# EAGLE board power electronicsV4.2 (EAGLE 9.6.2)
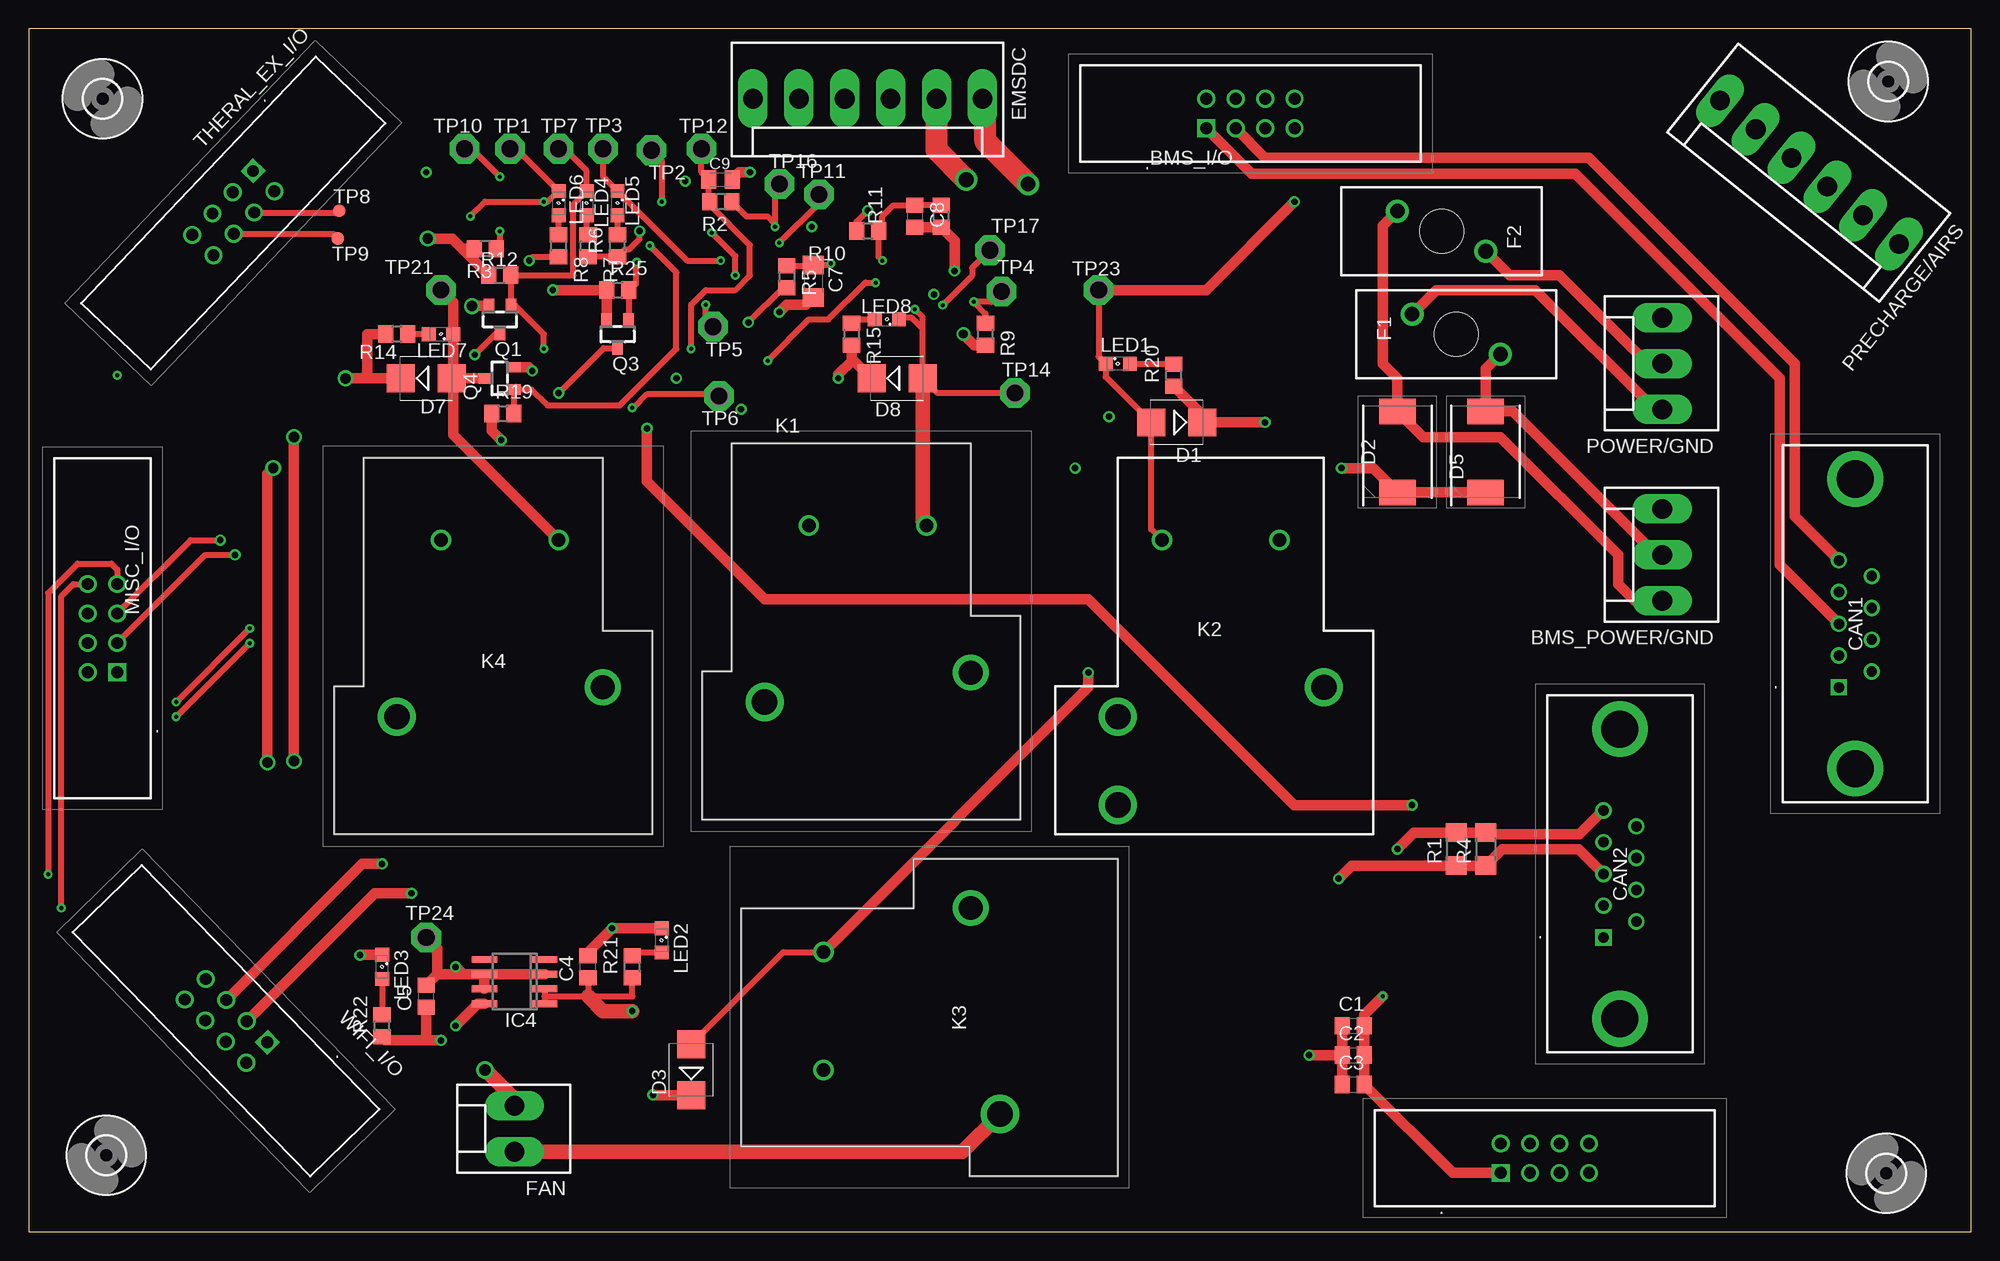
[diagram p0: board, top side]
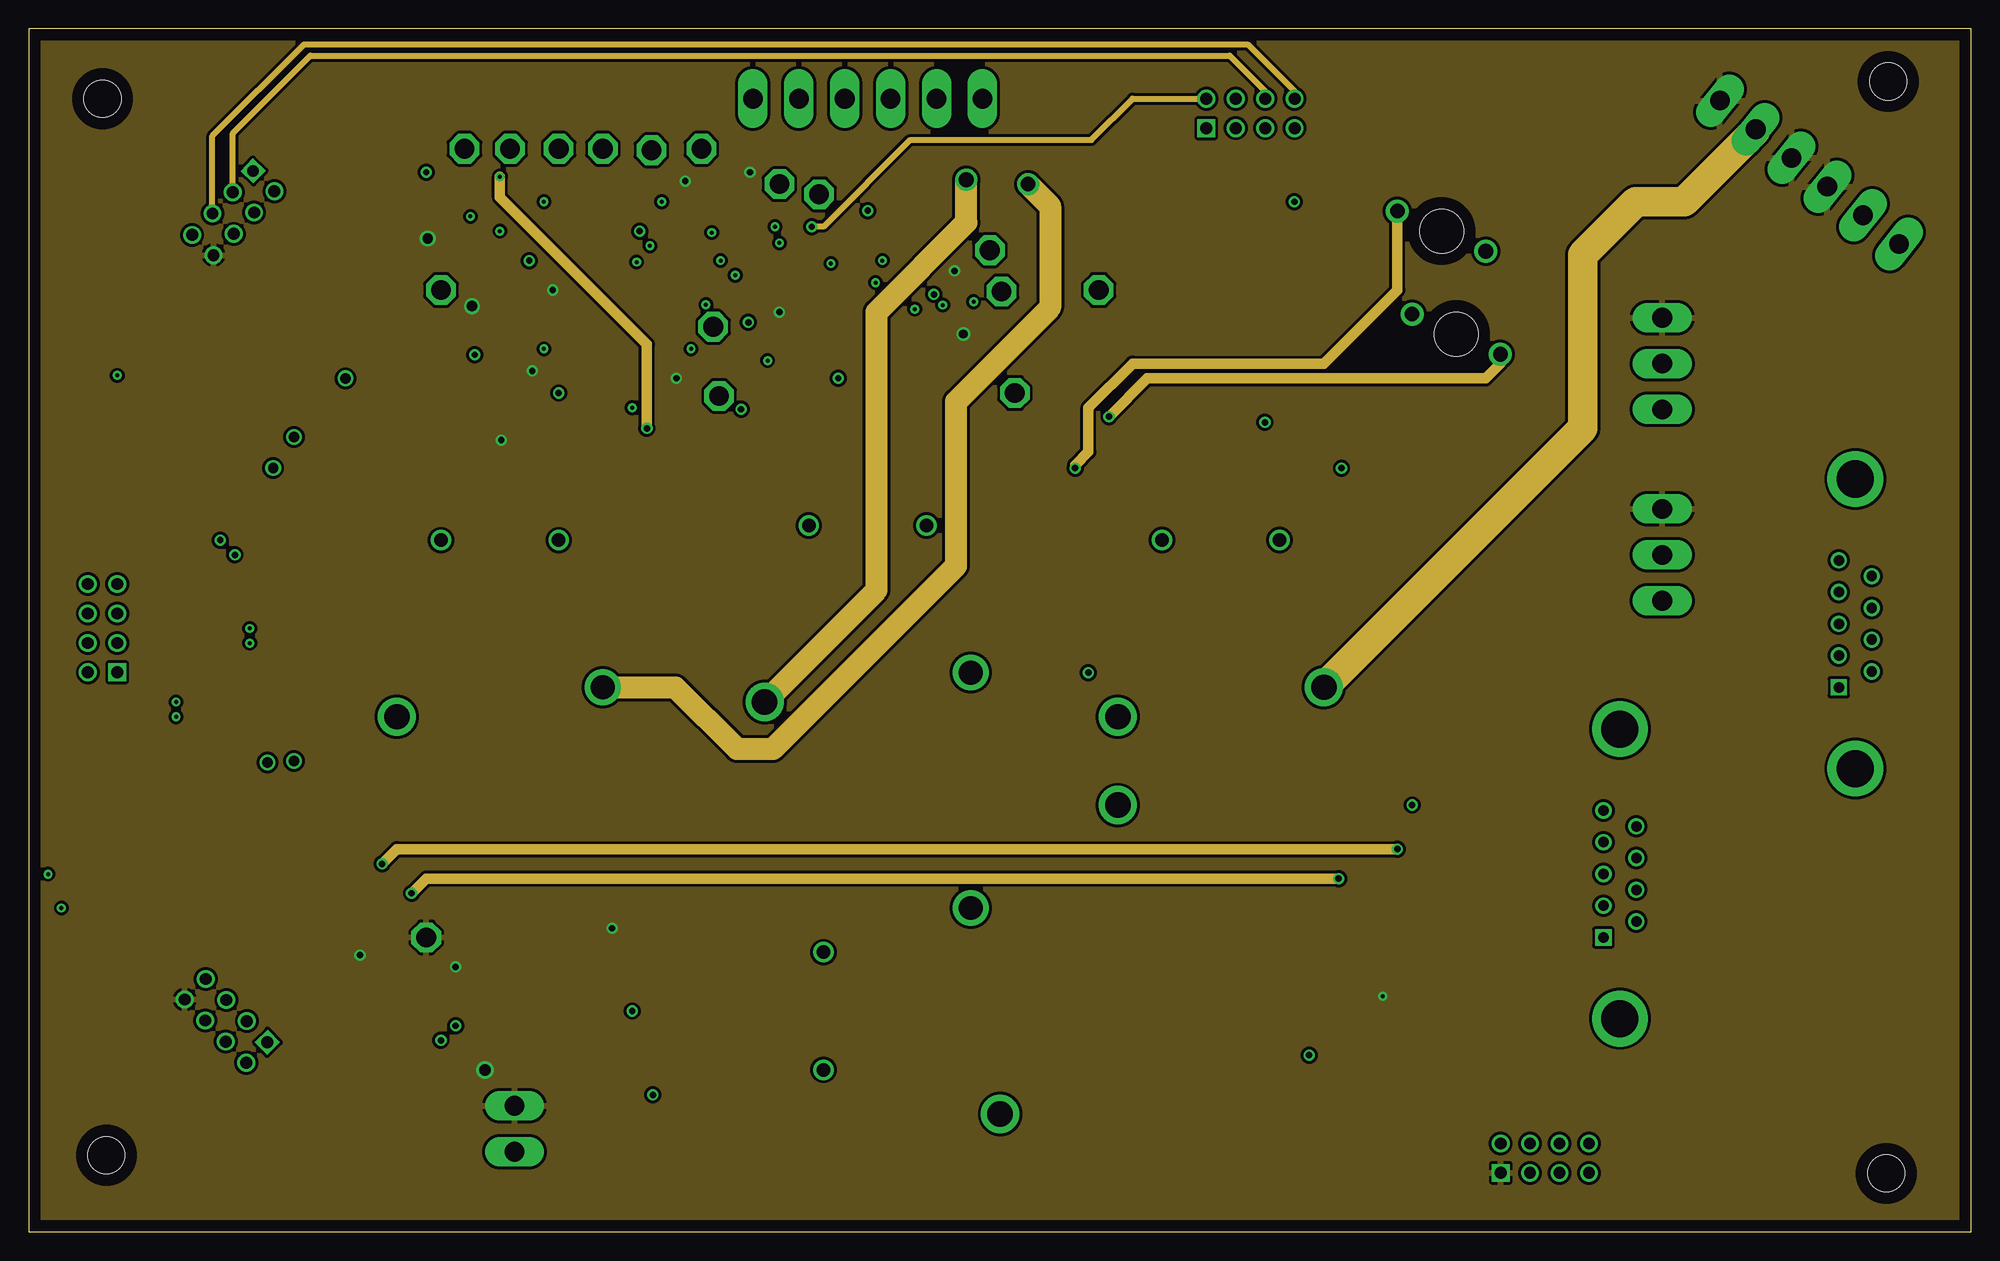
[diagram p1: board, inner layer Route2]
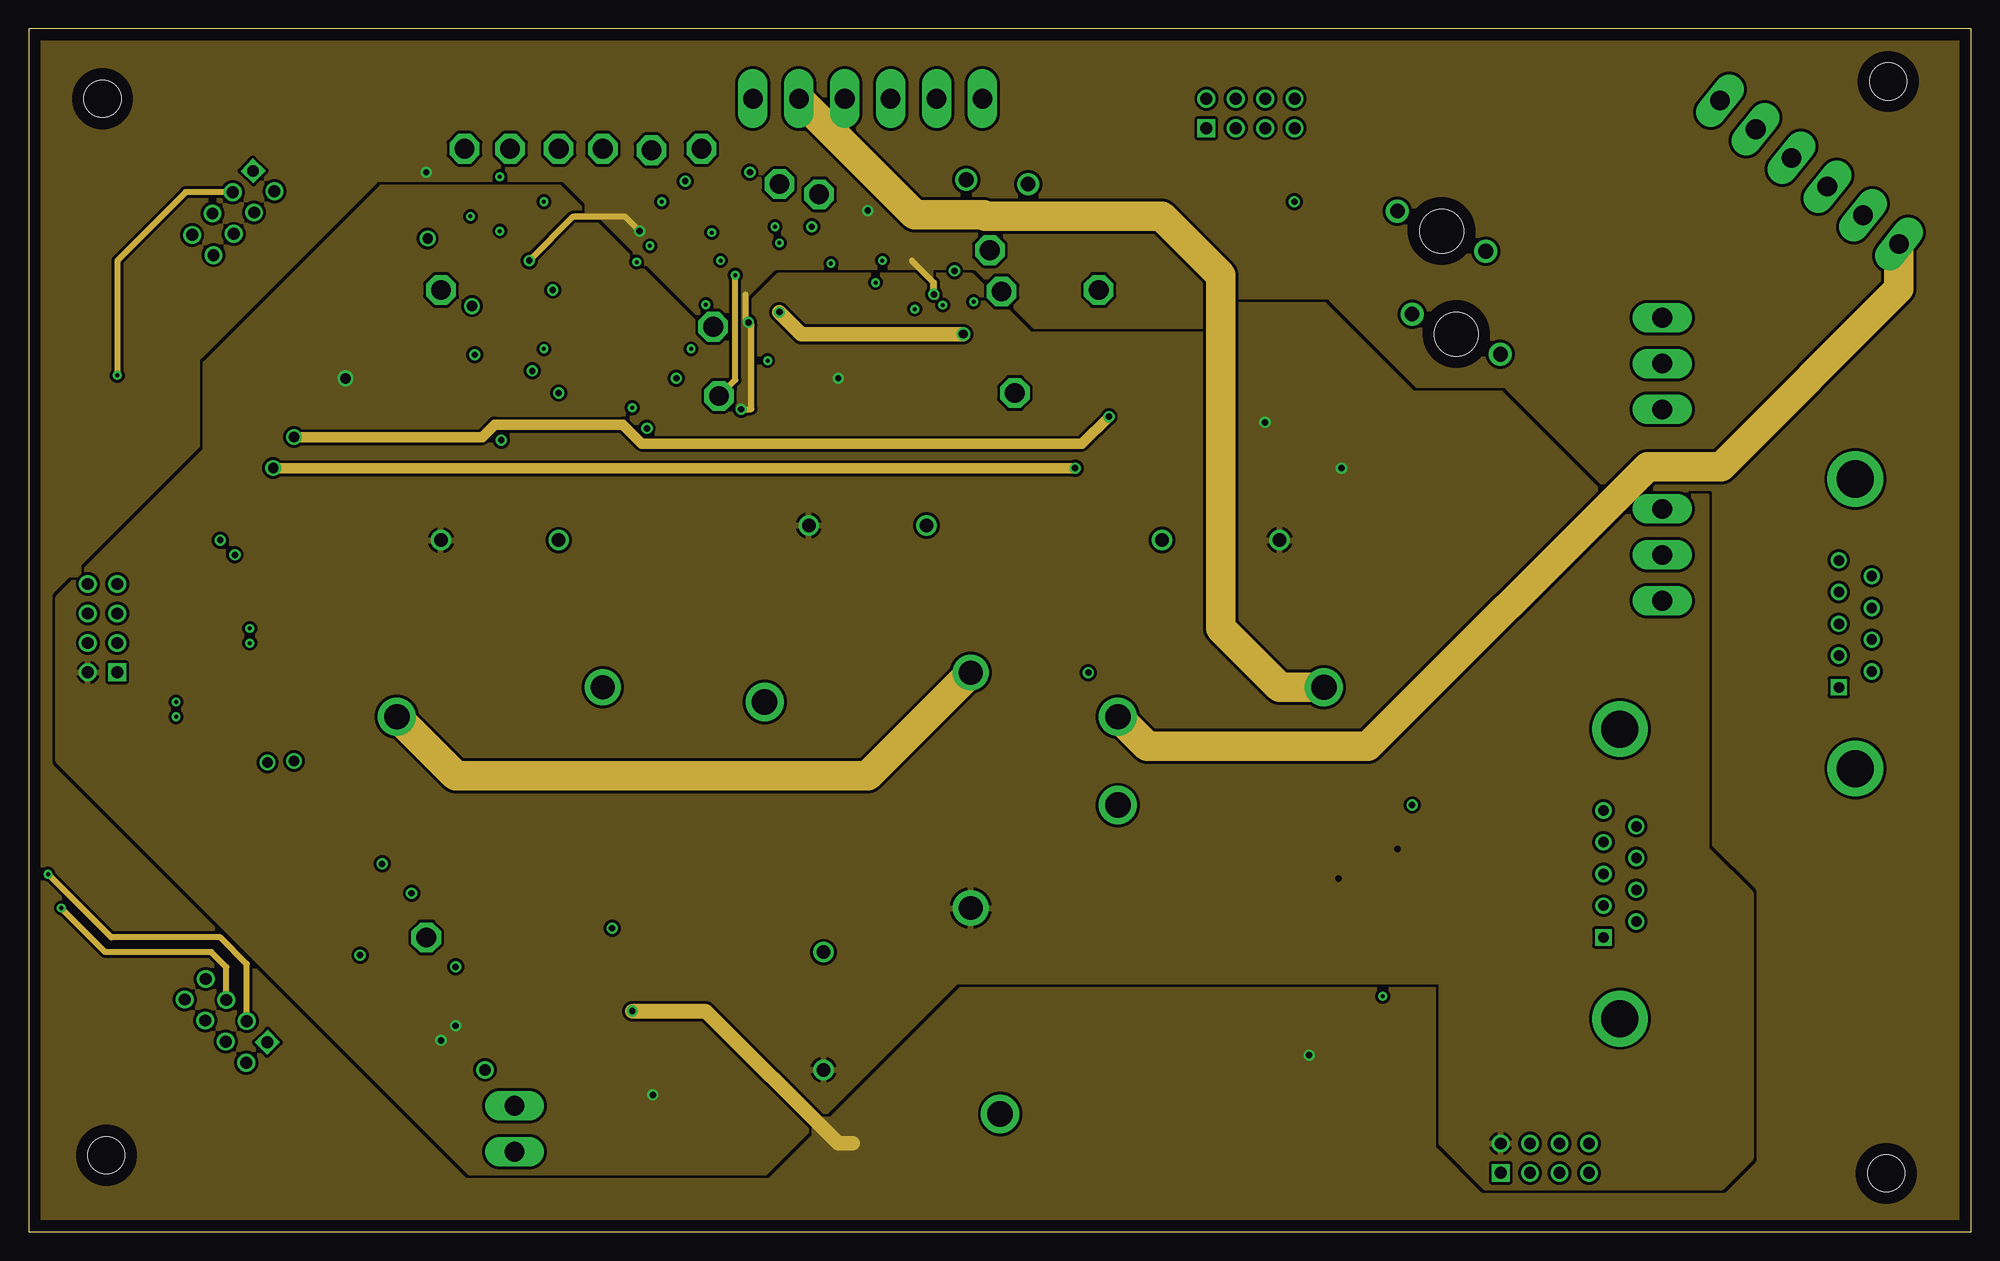
[diagram p2: board, inner layer Route15]
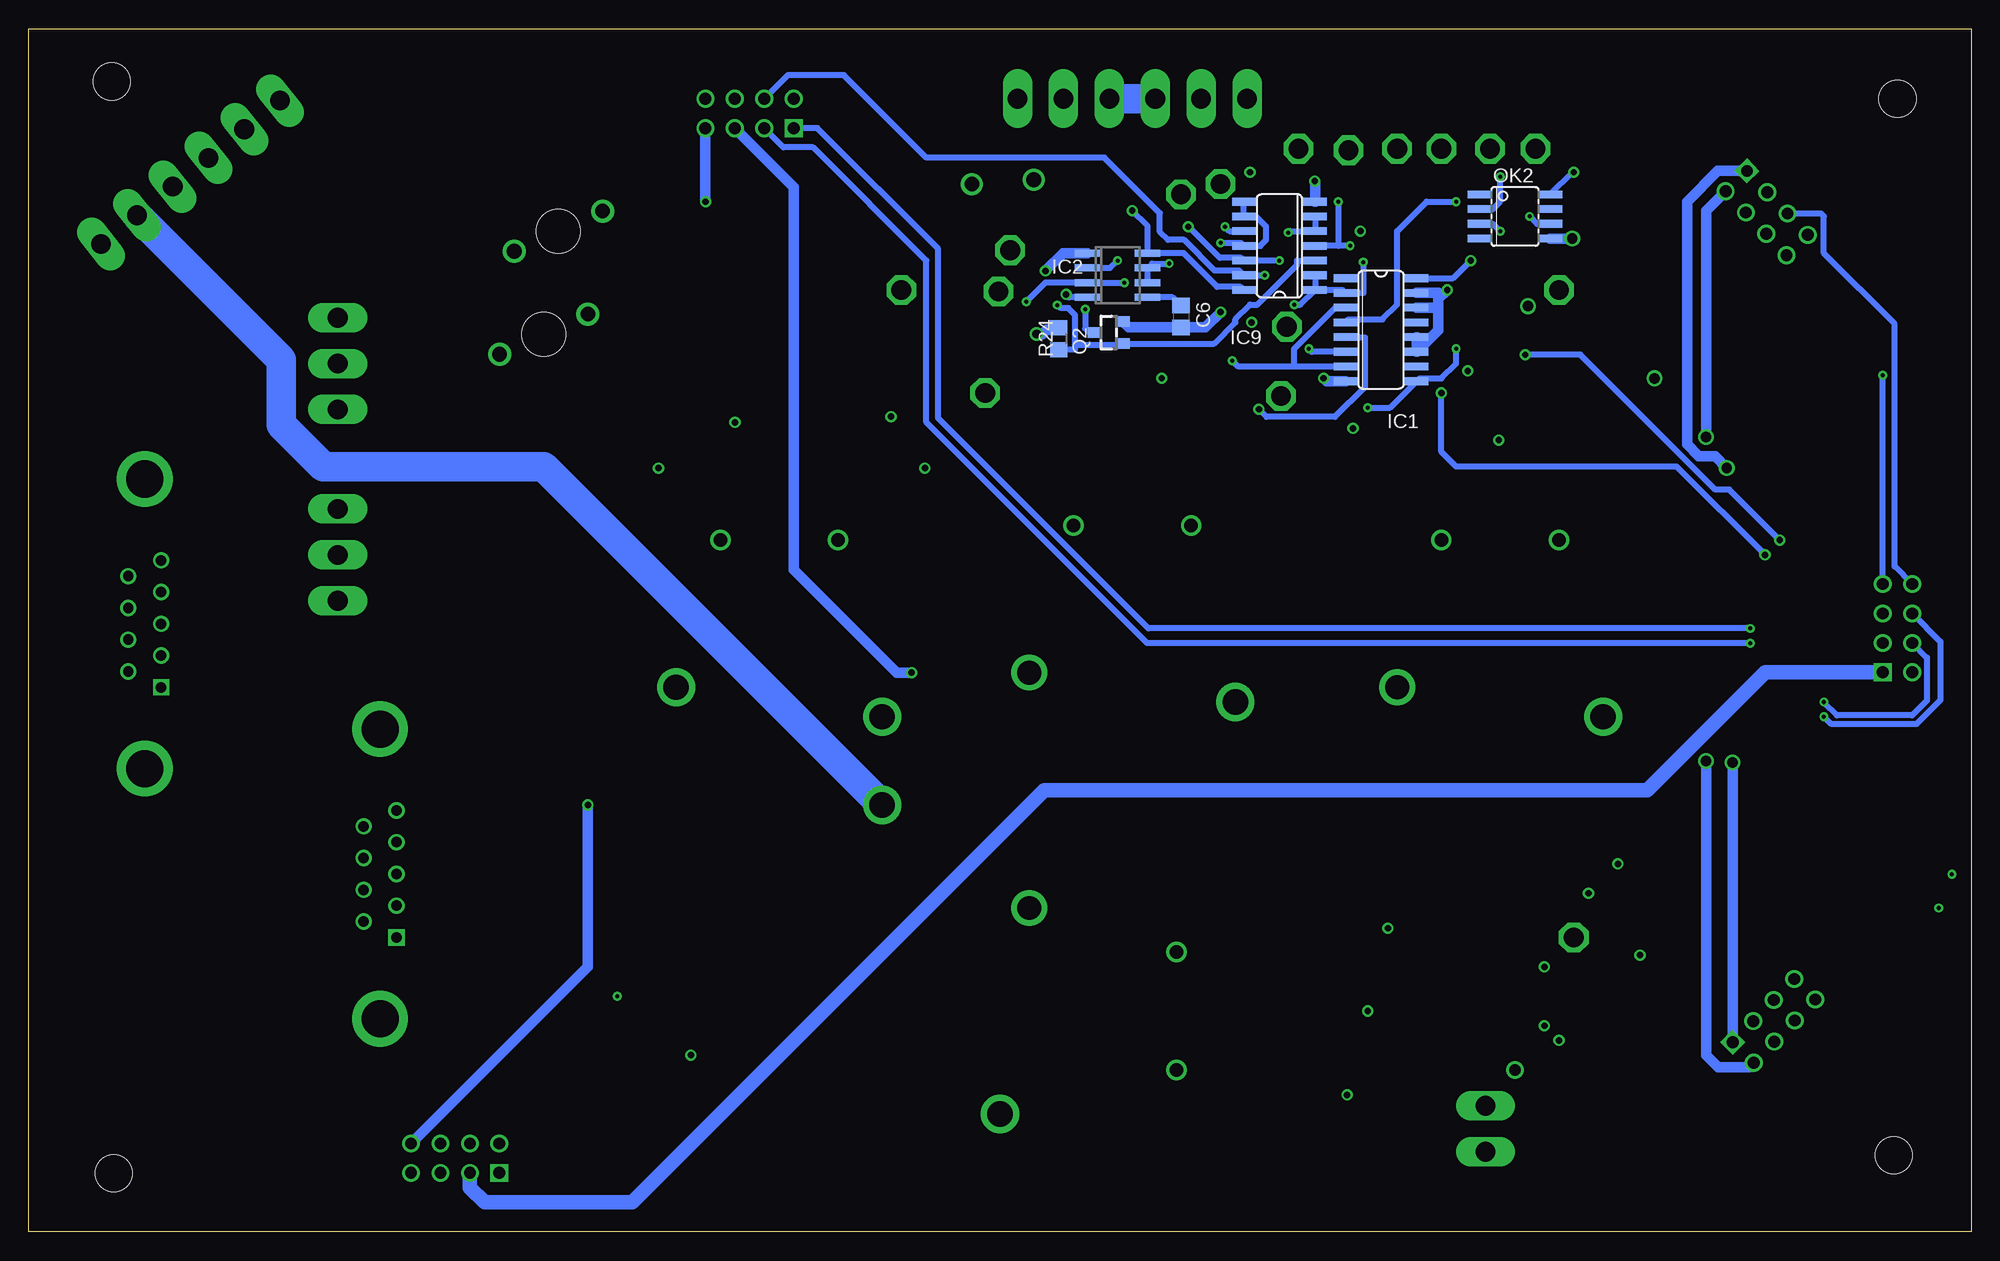
[diagram p3: board, bottom side, seen from below]

Size 167.62 x 103.81 mm. Coordinates in mm from the lower left corner, seen from the top.
Outline: 0,0 167.62,0 167.62,103.81 0,103.81 0,0
Copper layers ([2:[15:1+2*(15*16)]]): Top 0.035mm / dielectric 0.11mm / Route2 0.035mm / dielectric 1.2mm / Route15 0.035mm / dielectric 0.11mm / Bottom 0.035mm
Design rules "default *": minimum track width 6mil, minimum drill 0.35mm, track to track 10mil, track to pad 10mil, pad to pad 10mil, via to via 10mil, smd to smd 6mil, copper to edge 40mil, drill to drill 11mil, minimum pad ring 10mil, minimum via ring 8mil, stop-mask expansion 4mil, vias tented up to drill 0mil, thermal gap 10mil
Net classes: 0 default: width 0.508 mm; 1 GND: width 0.889 mm; 2 EMSDC: width 2.54 mm; 3 power: width 0.889 mm

## Footprints (pad centres in the part's own frame; a part is rotated, then mirrored left to right if it is on the bottom)
T816108A1S102CEU = drill 1.02 pad 1.53 square: 1 5.1,0 | drill 1.02 pad 1.53: 2 5.1,2.54; 3 7.64,0; 4 7.64,2.54; 5 10.18,0; 6 10.18,2.54; 7 12.72,0; 8 12.72,2.54
KK-156-3 = drill 1.7 pad 2.184 long: 1 -3.96,0; 2 0,0; 3 3.96,0
C0805 = smd 1.3 x 1.5: 1 -0.95,0; 2 0.95,0
C1206 = smd 1.6 x 1.8: 1 -1.4,0; 2 1.4,0
C0805K = smd 1.3 x 1.6: 1 -1,0; 2 1,0
LD09P24A4GV00LF = drill 0.9 pad 1.4 square: 1 0,0 | drill 0.9 pad 1.4: 2 2.74,0; 3 5.48,0; 4 8.22,0; 5 10.96,0; 6 1.37,-2.84; 7 4.11,-2.84; 8 6.85,-2.84; 9 9.59,-2.84 | drill 3.2 pad 4.8: MH1 -7.015,-1.42; MH2 17.975,-1.42
SMB = smd 2.4 x 2.4: A 2.2,0; C -2.2,0
DIOM7959X262N = smd 2.2 x 3.15: 1 -3.5,0; 2 3.5,0
KK-156-6 = drill 1.7 pad 2.184 long: 1 -9.9,0; 2 -5.94,0; 3 -1.98,0; 4 1.98,0; 5 5.94,0; 6 9.9,0
01530008 = drill 1.27 pad 2: 1 1.727,3.81; 2 -1.727,-3.81 | hole 3.785: 0,0
KK-156-2 = drill 1.7 pad 2.184 long: 1 -1.98,0; 2 1.98,0
3,2 = hole 3.2: 0,0
SO16 = smd 0.66 x 2.032: 1 -4.445,-3.073; 2 -3.175,-3.073; 3 -1.905,-3.073; 4 -0.635,-3.073; 5 0.635,-3.073; 6 1.905,-3.073; 7 3.175,-3.073; 8 4.445,-3.073; 9 4.445,3.073; 10 3.175,3.073; 11 1.905,3.073; 12 0.635,3.073; 13 -0.635,3.073; 14 -1.905,3.073; 15 -3.175,3.073; 16 -4.445,3.073
SO08 = smd 0.6 x 2.2: 1 -1.905,-2.6; 2 -0.635,-2.6; 3 0.635,-2.6; 4 1.905,-2.6; 5 1.905,2.6; 6 0.635,2.6; 7 -0.635,2.6; 8 -1.905,2.6
SOIC8 = smd 0.6 x 2.2: 1 -1.905,-2.6; 2 -0.635,-2.6; 3 0.635,-2.6; 4 1.905,-2.6; 5 1.905,2.6; 6 0.635,2.6; 7 -0.635,2.6; 8 -1.905,2.6
SO14 = smd 0.66 x 2.032: 1 -3.81,-3.073; 2 -2.54,-3.073; 3 -1.27,-3.073; 4 0,-3.073; 5 1.27,-3.073; 6 2.54,-3.073; 7 3.81,-3.073; 8 3.81,3.073; 9 2.54,3.073; 10 1.27,3.073; 11 0,3.073; 12 -1.27,3.073; 13 -2.54,3.073; 14 -3.81,3.073
T9AS1D1248T9A = drill 1.17 pad 1.755: 1 0,0; 2 -10.16,0 | drill 2.06 pad 3.09: 3 -13.97,12.7 | drill 2.19 pad 3.3: 4 3.81,15.24
T9AS1D12 = drill 2.19 pad 3.29: 1 -8.89,12.7; 2 8.89,15.24; 3 8.89,22.86 | drill 1.17 pad 1.77: 4 -5.08,0; 5 5.08,0
SML0805 = smd 1.2 x 1.2: A 1.05,0; C -1.05,0
SOIC08 = smd 0.66 x 2.032: 1 -1.905,-3.073; 2 -0.635,-3.073; 3 0.635,-3.073; 4 1.905,-3.073; 5 1.905,3.073; 6 0.635,3.073; 7 -0.635,3.073; 8 -1.905,3.073
SOT23 = smd 0.9 x 1.2: 1 -0.95,-1.2; 2 0.95,-1.2; 3 0,1.2
R1206 = smd 1.6 x 1.803: 1 -1.422,0; 2 1.422,0
R0805 = smd 1.3 x 1.5: 1 -0.95,0; 2 0.95,0
P1-17 = drill 1.702 pad 2.54 octagon: TP 0,0
TP11R = smd 1.1 x 1.1: TP 0,0

## Placement (x,y rotation side)
BMS_I/O  T816108A1S102CEU  [T816108A1S102CEU]  96.52,95.25 0 top
BMS_POWER/GND  [KK-156-3]  140.97,58.42 90 top
C1  0.1uF  [C0805]  114.3,17.78 0 top
C2  0.1uF  [C0805]  114.3,15.24 0 top
C3  0.1uF  [C0805]  114.3,12.7 0 top
C4  3.3uF  [C0805]  48.26,22.86 90 top
C5  1uF  [C0805]  34.29,20.32 90 top
C6  0.1uF  [C0805]  68.2,78.99 270 bottom
C7  22uF  [C1206]  67.69,82.04 270 top
C8  10uF  [C0805]  76.45,87.63 270 top
C9  DNP  [C0805K]  59.69,90.81 0 top
CAN1  LD09P24A4GV00LF  [LD09P24A4GV00LF]  156.21,46.99 90 top
CAN2  LD09P24A4GV00LF  [LD09P24A4GV00LF]  135.89,25.4 90 top
D1  ES2D  [SMB]  99.06,69.85 180 top
D2  VS-30BQ100-M3_9AT  [DIOM7959X262N]  118.11,67.31 90 top
D3  ES2D  [SMB]  57.15,13.97 90 top
D5  VS-30BQ100-M3_9AT  [DIOM7959X262N]  125.73,67.31 90 top
D7  ES2D  [SMB]  34.29,73.66 0 top
D8  ES2D  [SMB]  74.93,73.66 0 top
EMSDC  [KK-156-6]  72.39,97.79 180 top
F1  01530008Z  [01530008]  123.19,77.47 270 top
F2  01530008Z  [01530008]  121.92,86.36 90 top
FAN  [KK-156-2]  41.91,8.89 90 top
H1  MOUNT-HOLE3.2  [3,2]  6.35,97.79 90 top
H2  MOUNT-HOLE3.2  [3,2]  6.68,6.6 0 top
H3  MOUNT-HOLE3.2  [3,2]  160.48,99.28 0 top
H4  MOUNT-HOLE3.2  [3,2]  160.3,5.04 90 top
IC1  4043D  [SO16]  50.93,77.85 270 bottom
IC2  SE555D  [SO08]  73.66,82.55 270 bottom
IC4  [SOIC8]  41.91,21.59 90 top
IC9  4011D  [SO14]  59.69,85.09 90 bottom
ISOMETER_I/O  T816108A1S102CEU  [T816108A1S102CEU]  121.92,5.08 0 top
K1  T9AS1D12-48=T9A  [T9AS1D1248T9A]  67.31,60.96 180 top
K2  T9AS5D12-12=T9A  [T9AS1D12]  102.87,59.69 180 top
K3  T9AS1D12-48=T9A  [T9AS1D1248T9A]  68.58,13.97 270 top
K4  T9AS1D12-48=T9A  [T9AS1D1248T9A]  35.56,59.69 180 top
LED1  [SML0805]  93.98,74.93 0 top
LED2  [SML0805]  54.61,25.15 270 top
LED3  [SML0805]  30.48,22.86 270 top
LED4  [SML0805]  48.13,88.77 270 top
LED5  [SML0805]  50.8,88.77 270 top
LED6  [SML0805]  45.72,88.77 270 top
LED7  [SML0805]  35.56,77.47 180 top
LED8  [SML0805]  74.04,78.74 180 top
MISC_I/O  T816108A1S102CEU  [T816108A1S102CEU]  7.62,43.18 90 top
OK2  HCPL0453  [SOIC08]  39.37,87.63 270 bottom
POWER/GND  [KK-156-3]  140.97,74.93 90 top
PRECHARGE/AIRS  [KK-156-6]  153.67,91.44 141.3 top
Q1  BSS138  [SOT23]  40.64,78.74 180 top
Q2  BSS138  [SOT23]  74.42,77.6 90 bottom
Q3  BSS138  [SOT23]  50.8,77.47 180 top
Q4  BSS138  [SOT23]  40.64,73.66 90 top
R1  120  [R1206]  123.19,33.02 90 top
R2  0R  [R0805]  59.69,88.9 180 top
R3  2.2K  [R0805]  39.37,84.84 180 top
R4  120  [R1206]  125.73,33.02 90 top
R5  100K  [R0805]  65.41,82.42 270 top
R6  330  [R0805]  50.8,85.09 90 top
R7  330  [R0805]  48.26,85.09 90 top
R8  330  [R0805]  45.72,85.09 90 top
R9  10K  [R0805]  82.55,77.47 90 top
R10  200K  [R0805]  72.39,86.36 180 top
R11  510K  [R0805]  78.74,87.63 90 top
R12  [R0805]  40.64,82.55 0 top
R14  [R0805]  31.75,77.47 180 top
R15  [R0805]  70.99,77.47 270 top
R19  [R0805]  40.89,70.61 0 top
R20  1.2K  [R0805]  98.81,73.91 90 top
R21  330  [R0805]  52.07,22.86 90 top
R22  1.2K  [R0805]  30.48,17.78 90 top
R24  [R0805]  78.74,77.09 270 bottom
R25  [R0805]  50.8,81.28 0 top
THERAL_EX_I/O  T816108A1S102CEU  [T816108A1S102CEU]  22.86,95.25 226.4 top
TP1  TPPAD1-17  [P1-17]  41.53,93.47 0 top
TP2  TPPAD1-17  [P1-17]  53.72,93.34 0 top
TP3  TPPAD1-17  [P1-17]  49.53,93.47 0 top
TP4  TPPAD1-17  [P1-17]  83.95,81.15 0 top
TP5  TPPAD1-17  [P1-17]  59.05,78.11 0 top
TP6  TPPAD1-17  [P1-17]  59.56,72.14 0 top
TP7  TPPAD1-17  [P1-17]  45.72,93.47 0 top
TP8  TPSTP11R  [TP11R]  26.8,88.14 0 top
TP9  TPSTP11R  [TP11R]  26.67,85.72 0 top
TP10  TPPAD1-17  [P1-17]  37.59,93.47 0 top
TP11  TPPAD1-17  [P1-17]  68.2,89.53 0 top
TP12  TPPAD1-17  [P1-17]  58.04,93.47 0 top
TP14  TPPAD1-17  [P1-17]  85.09,72.39 0 top
TP16  TPPAD1-17  [P1-17]  64.77,90.42 0 top
TP17  TPPAD1-17  [P1-17]  82.93,84.71 0 top
TP21  TPPAD1-17  [P1-17]  35.56,81.28 0 top
TP23  TPPAD1-17  [P1-17]  92.33,81.28 0 top
TP24  TPPAD1-17  [P1-17]  34.29,25.4 0 top
WIFI_I/O  T816108A1S102CEU  [T816108A1S102CEU]  24.13,12.7 134.2 top

## Library data of the parts
BMS_I/O ISOMETER_I/O MISC_I/O THERAL_EX_I/O WIFI_I/O = T816108A1S102CEU; DESCRIPTION: Amphenol T816 Series, 2.54mm Pitch 8 Way 2 Row Straight PCB Header, Solder Termination, 3A; HEIGHT: 27.2mm; MANUFACTURER_NAME: Amphenol; MANUFACTURER_PART_NUMBER: T816108A1S102CEU
BMS_POWER/GND EMSDC FAN POWER/GND PRECHARGE/AIRS = con-molex; MF: MOLEX; OC_FARNELL: unknown; OC_NEWARK: unknown
C1-C9 = rcl; SPICEPREFIX: C
CAN1 CAN2 = LD09P24A4GV00LF; ARROW_PART_NUMBER: LD09P24A4GV00LF; ARROW_PRICE-STOCK: https://www.arrow.com/en/products/ld09p24a4gv00lf/amphenol-fci?region=nac; DESCRIPTION: Amphenol FCI LD Series, 9 Way Plug-In Mount D-sub Connector Plug, 2.74mm Pitch, with Screw; HEIGHT: 12.15mm; MANUFACTURER_NAME: Amphenol Communication Solutions; MANUFACTURER_PART_NUMBER: LD09P24A4GV00LF; MOUSER_PART_NUMBER: 649-LD09P24A4GV00LF; MOUSER_PRICE-STOCK: https://www.mouser.co.uk/ProductDetail/Amphenol-FCI/LD09P24A4GV00LF?qs=tZOhSuJQg1nfkziarphghA%3D%3D
D1 D3 D7 D8 = diode
D2 D5 = SamacSys_Parts; DESCRIPTION: Vishay VS-30BQ100-M3/9AT SMT Schottky Diode, 100V 3A, 2-Pin DO-214AB; HEIGHT: 2.62mm; MANUFACTURER_NAME: Vishay; MANUFACTURER_PART_NUMBER: VS-30BQ100-M3/9AT; MOUSER_PART_NUMBER: 78-VS-30BQ100-M39AT; MOUSER_PRICE-STOCK: https://www.mouser.com/Search/Refine.aspx?Keyword=78-VS-30BQ100-M39AT
F1 F2 = SamacSys_Parts; ALLIED_NUMBER: 70184304; DESCRIPTION: Mini fuseholder,15A 32V Littelfuse 15A PCB Mount Fuse Holder Automotive Fuse, 32 V; HEIGHT: mm; MANUFACTURER_NAME: LITTELFUSE; MANUFACTURER_PART_NUMBER: 01530008Z; RS_PART_NUMBER: 3607317; RS_PRICE-STOCK: https://uk.rs-online.com/web/p/products/3607317
H1-H4 = holes
IC1 IC9 = 40xx
IC2 = linear
IC4 = linear-technology; MPN: LT1129CS8-5#PBF; OC_FARNELL: 1273576; OC_NEWARK: 57M2078
K1 K3 K4 = SamacSys_Parts; DESCRIPTION: SPST-NO PCB Mount Non-Latching Relay Through Hole, 48V dc; HEIGHT: 20.4mm; MANUFACTURER_NAME: TE Connectivity; MANUFACTURER_PART_NUMBER: T9AS1D12-48=T9A; RS_PART_NUMBER: 6802534P; RS_PRICE-STOCK: http://uk.rs-online.com/web/p/products/6802534P
K2 = SamacSys_Parts; ALLIED_NUMBER: R1111589; DESCRIPTION: PCB Relay SPDT 30A 12Vdc,thru hole SPDT PCB Mount Non-Latching Relay Through Hole, 12V dc; HEIGHT: mm; MANUFACTURER_NAME: TE Connectivity; MANUFACTURER_PART_NUMBER: T9AS5D12-12=T9A; RS_PART_NUMBER: 6802528; RS_PRICE-STOCK: https://uk.rs-online.com/web/p/products/6802528
LED1-LED8 = led
OK2 = optocoupler; MF: AGILENT TECHNOLOGIES; MPN: HCPL-0453-000E; OC_FARNELL: 1505123; OC_NEWARK: 88H7766
Q1-Q4 = m-pad-2.1
R1-R12 R14 R15 R19-R22 R24 R25 = rcl; SPICEPREFIX: R
TP1-TP12 TP14 TP16 TP17 TP21 TP23 TP24 = testpad

## Nets
+3V3: C1.1 C2.1 C3.1 C4.1 IC1.5 IC1.16 IC2.4 IC2.8 IC4.1 IC4.2 IC9.14 OK2.8 R5.2 R6.1 R7.1 R8.1 R10.2 R21.1
+12V [power]: C5.1 D1.C D2.1 D3.C D5.1 D7.C D8.C IC4.8 ISOMETER_I/O.2 K1.1 K2.4 K3.1 K3.3 K4.1 MISC_I/O.2 R14.2 R15.2 R20.1 R22.1
AMS_LED-: MISC_I/O.5 Q1.3
CAN1_H: BMS_I/O.1 CAN1.3 MISC_I/O.4
CAN1_L: BMS_I/O.3 CAN1.5 MISC_I/O.6
CAN2_H: BMS_I/O.6 CAN2.3 MISC_I/O.7 R1.1 R4.1 THERAL_EX_I/O.3 WIFI_I/O.3
CAN2_L: BMS_I/O.8 CAN2.5 MISC_I/O.8 R1.2 R4.2 THERAL_EX_I/O.5 WIFI_I/O.5
CHARGE_POWER [power]: BMS_POWER/GND.2 D5.2 F1.1 THERAL_EX_I/O.2 WIFI_I/O.2
CHARGE_SAFE: BMS_I/O.2 IC9.12 LED5.C TP3.TP
CHASSIS_GND [GND]: ISOMETER_I/O.3 MISC_I/O.1
DISCHARGE_ENABLE: BMS_I/O.4 IC1.9 IC9.5 IC9.6 IC9.13 LED4.C Q1.1 R12.2 TP6.TP TP7.TP
FAN+ [power]: FAN.1 K3.4
FAN_ENABLE: BMS_I/O.5 D3.A K3.2
GND [GND]: BMS_POWER/GND.3 C1.2 C2.2 C3.2 C4.2 C5.2 C6.2 C7.2 C8.2 C9.2 FAN.2 IC1.8 IC1.11 IC1.12 IC1.14 IC1.15 IC2.1 IC4.3 IC4.6 IC4.7 IC9.7 ISOMETER_I/O.1 LED2.C LED3.C OK2.5 POWER/GND.3 PRECHARGE/AIRS.3 PRECHARGE/AIRS.4 PRECHARGE/AIRS.6 Q1.2 Q2.2 Q3.2 Q4.2 R3.2 R9.1 R11.1 R12.1 R19.1 R24.1 R25.1 THERAL_EX_I/O.8 TP24.TP WIFI_I/O.8
HIGHEST_TEMP: THERAL_EX_I/O.4 TP8.TP
IMD_COIL_OUT: D8.A K1.2 LED8.C Q2.3 TP14.TP
IMD_LED-: MISC_I/O.3 Q3.3
LOWEST_TEMP: THERAL_EX_I/O.6 TP9.TP
M_HS: ISOMETER_I/O.5
N$1: IC9.10 R2.1 TP16.TP
N$2 [power]: F2.2 POWER/GND.2
N$3 [EMSDC]: K2.2 PRECHARGE/AIRS.1
N$4 [power]: F1.2 POWER/GND.1
N$5: IC1.4 LED6.C OK2.6 TP1.TP
N$6: IC9.8 IC9.9 IC9.11 TP11.TP
N$7: OK2.3 R3.1
N$8: IC9.3 Q2.1 R24.2 TP17.TP
N$9: IC1.2 IC9.1 IC9.2 Q3.1 R25.2 TP5.TP
N$10: C9.1 IC1.6 R2.2 TP12.TP
N$11 [EMSDC]: EMSDC.5 K2.1 PRECHARGE/AIRS.5
N$12 [EMSDC]: K2.3 PRECHARGE/AIRS.2
N$13 [power]: EMSDC.1 K4.3
N$14: EMSDC.2 K1.4
N$15 [GND]: D7.A K4.2 LED7.C Q4.3 TP21.TP
N$16: IC9.4 Q4.1 R19.2 TP2.TP
N$17: C7.1 IC2.6 IC2.7 R5.1
N$18: LED7.A R14.1
N$19 [EMSDC]: EMSDC.3 EMSDC.4
N$20: LED8.A R15.1
N$21 [GND]: K1.3 K4.4
N$22: LED1.A R20.2
N$23: LED2.A R21.2
N$24: LED3.A R22.2
N$25: LED4.A R7.2
N$26: LED5.A R6.2
N$27: LED6.A R8.2
N$28: C8.1 IC2.2 R10.1 R11.2
N$32: C6.1 IC2.5
OK_HS: ISOMETER_I/O.8 OK2.2 TP10.TP
PRECHARGE_SELECT: BMS_I/O.7 D1.A K2.5 LED1.C TP23.TP
READY_POWER [power]: BMS_POWER/GND.1 D2.2 F2.1 THERAL_EX_I/O.1 WIFI_I/O.1
STARTUP_RESET: IC1.3 IC1.7 IC2.3 R9.2 TP4.TP

## Tracks (layer width: path | path; a pad name or v marks a point on that pad's centre or on a via)
+3V3  (via drill 0.55)
  Top 0.508: IC4.2 44.51,20.32 | 44.51,20.32 IC4.1 | C4.1 48.26,20.32 | 48.26,20.32 52.07,20.32 R21.1 | 44.51,20.32 48.26,20.32 | R5.2 65.09,81.47 v62.1,78.49 | R7.1 R6.1 51.45,84.79 51.8,84.79 52.7,85.7 v52.7,86.36 | v43.18,83.82 43.5,84.14 R8.1 | R10.2 71.44,87.19 v72.39,88.14
  Top 0.889: C1.1 C2.1 | C3.1 C2.1 | C2.1 v110.49,15.24
  Top 1.27: 48.26,20.32 49.53,19.05 v52.07,19.05
  Route15 0.508: v61.47,70.99 62.36,70.99 62.36,78.23 v62.1,78.49 61.84,78.74 61.84,80.89 | v43.18,83.82 46.99,87.63 51.44,87.63 v52.7,86.36 | v78.11,80.9 78.11,81.92 76.2,83.82
  Route15 1.27: v52.07,19.05 58.42,19.05 69.85,7.62 71.12,7.62
  Bottom 0.508: IC1.5 53.98,77.19 52.32,77.19 52.32,72.91 54.91,70.33 60.8,70.33 v61.47,70.99 | IC1.16 44.7,82.3 v43.18,83.82 | IC9.14 63.04,81.56 65.08,81.56 67.97,84.45 IC2.8 71.06,86.81 v72.39,88.14 | OK2.8 34.39,91.44 v34.29,91.44 | IC2.4 77.85,80.64 v78.11,80.9
  pour Route15 (rank 2): 0,104.14 165.1,104.14 167.64,101.6 167.64,0 1.27,0 0,-1.27
+12V  (via drill 0.55, 0.9)
  Top 0.889: R22.1 30.8,16.51 34.29,16.51 | 34.29,16.51 C5.1 | 34.29,16.51 v35.56,16.51 | IC4.8 38.73,19.68 v36.83,17.78 | D3.C 53.89,11.77 v53.85,11.81 | R14.2 29.21,77.47 29.21,73.66 | 29.21,73.66 D7.C | 29.21,73.66 v27.3,73.66 | D8.C 71.12,75.27 70.99,75.14 | 70.99,75.14 R15.2 | 70.99,75.14 69.85,74 v69.85,73.66 | D5.1 D2.1 116.01,65.91 v113.28,65.91 | R20.1 101.26,70.51 D1.C v106.68,69.85
  pour Route15: 63.5,5.08 38.1,5.08 2.54,40.64 2.54,54.74 15.24,67.44 15.24,74.93 30.48,90.17 45.72,90.17 58.42,77.47 59.69,77.47 64.77,82.55 81.28,82.55 86.36,77.47 101.6,77.47 104.14,80.01 111.76,80.01 119.38,72.39 127,72.39 135.89,63.5 144.78,63.5 144.78,33.02 148.59,29.21 148.59,6.35 146.05,3.81 125.73,3.81 121.92,7.62 121.92,21.59 80.01,21.59
AMS_LED-  (via drill 0.55)
  Top 0.508: MISC_I/O.5 13.95,59.69 v16.51,59.69 | v38.48,75.69 40.33,77.54 Q1.3
  Bottom 0.508: v16.51,59.69 20.87,64.05 22.07,64.05 33.72,75.69 v38.48,75.69
CAN1_H  (via drill 0.35)
  Top 0.508: BMS_I/O.1 101.6,95.25 | v12.7,45.72 v19.05,52.07
  Top 0.889: CAN1.3 151.13,57.55 151.13,73.66 133.48,91.31 105.54,91.31 101.6,95.25
  Bottom 0.508: BMS_I/O.1 99.57,95.25 89.15,84.84 89.15,70.23 70.99,52.07 v19.05,52.07 | MISC_I/O.4 3.81,49.55 3.81,48.81 3.81,47.75 3.81,45.84 5.08,44.57 11.55,44.57 v12.7,45.72
CAN1_L  (via drill 0.35)
  Top 0.508: v12.7,44.45 v19.05,50.8
  Top 0.889: CAN1.5 152.4,61.76 152.4,74.93 134.62,92.71 106.68,92.71 104.16,95.23 BMS_I/O.3
  Bottom 0.508: v19.05,50.8 71.12,50.8 90.17,69.85 90.17,83.82 99.95,93.6 102.51,93.6 BMS_I/O.3 | MISC_I/O.6 2.64,50.92 2.64,45.89 4.72,43.81 12.06,43.81 v12.7,44.45
CAN2_H  (via drill 0.35, 0.55, 0.55 layers 1-2)
  Top 0.508: MISC_I/O.7 7.62,57.15 7.11,57.66 4.19,57.66 1.65,55.12 v1.65,30.86
  Top 0.889: CAN2.3 133.75,33.02 127.15,33.02 R4.1 R1.1 114.15,31.6 v113.03,30.48 | WIFI_I/O.3 29.84,29.21 v33.02,29.21
  Route2 0.508: THERAL_EX_I/O.3 17.59,94.81 24.29,101.5 103.62,101.5 106.7,98.42 BMS_I/O.6
  Route2 0.889: v33.02,29.21 34.29,30.48 v113.03,30.48
  Route15 0.508: v1.65,30.86 7.11,25.4 16.51,25.4 18.8,23.11 WIFI_I/O.3 | THERAL_EX_I/O.3 13.52,89.72 7.62,83.82 v7.62,73.91
  Bottom 0.508: MISC_I/O.7 v7.62,73.91
CAN2_L  (via drill 0.35, 0.55, 0.55 layers 1-2)
  Top 0.508: v2.79,27.94 2.79,54.86 3.83,55.9 MISC_I/O.8
  Top 0.889: CAN2.5 133.82,34.29 125.88,34.29 R4.2 R1.2 119.53,34.44 v118.11,33.02 | WIFI_I/O.5 28.79,31.75 v30.48,31.75
  Route2 0.508: THERAL_EX_I/O.5 15.84,94.58 23.75,102.49 105.18,102.49 109.24,98.42 BMS_I/O.8
  Route2 0.889: v30.48,31.75 31.75,33.02 v118.11,33.02
  Route15 0.508: WIFI_I/O.5 17.03,22.84 15.75,24.13 6.6,24.13 v2.79,27.94
  Bottom 0.508: MISC_I/O.8 6.6,57.42 6.6,78.36 12.7,84.45 12.7,87.63 12.95,87.88 THERAL_EX_I/O.5
CHARGE_POWER  (via drill 0.55, 0.9)
  Top 0.889: F1.1 125.73,74.47 D5.2 128.07,70.81 140.46,58.42 BMS_POWER/GND.2 | v22.86,40.64 v22.86,68.58
  Route2 0.889: v93.22,70.36 96.52,73.66 125.73,73.66 127,74.93 F1.1
  Route15 0.889: v22.86,68.58 39.12,68.58 40.2,69.66 51.25,69.66 52.9,68.01 90.87,68.01 v93.22,70.36
  Bottom 0.889: WIFI_I/O.2 19.14,14.2 21.82,14.2 22.86,15.24 v22.86,40.64 | v22.86,68.58 22.86,88.13 THERAL_EX_I/O.2
CHARGE_SAFE  (via drill 0.35, 0.55)
  Top 0.508: v59.69,83.82 56.8,83.82 LED5.C 49.53,91.09 TP3.TP
  Route2 0.508: v67.56,86.74 68.58,86.74 76.07,94.23 91.69,94.23 95.25,97.79 BMS_I/O.2
  Bottom 0.508: v59.69,83.82 IC9.12 62.99,84.05 64.84,84.05 67.53,86.74 v67.56,86.74
CHASSIS_GND
  Bottom 1.27: ISOMETER_I/O.3 129.56,3.81 128.29,2.54 115.57,2.54 80.01,38.1 27.94,38.1 17.76,48.28 MISC_I/O.1
DISCHARGE_ENABLE  (via drill 0.35)
  Top 0.508: v58.93,86.23 60.96,84.2 v60.96,82.55 | v44.45,76.2 44.45,77.47 41.98,79.94 Q1.1 R12.2 46.99,82.55 46.99,88.68 LED4.C 48.13,91.57 46.23,93.47 TP7.TP | TP6.TP 59.44,72.26 53.34,72.26 52.2,71.12 v52.07,71.12
  Route15 0.508: TP6.TP 60.96,73.53 v60.96,82.55
  Bottom 0.508: IC9.6 IC9.5 58.8,86.36 v58.93,86.23 | v60.96,82.55 IC9.13 63.17,82.96 65.28,82.96 67.93,85.6 69.31,85.6 70.01,86.3 70.01,87.92 74.8,92.71 90.17,92.71 97.28,99.82 102.13,99.82 BMS_I/O.4 | v44.45,76.2 44.45,74.93 45.72,73.66 47.6,73.66 IC1.9 50.14,71.12 v52.07,71.12
FAN+
  Top 1.27: K3.4 80.57,6.91 FAN.1
FAN_ENABLE  (via drill 0.55)
  Top 0.508: D3.A 65.11,24.13 K3.2
  Top 0.889: v91.44,48.26 91.44,46.99 K3.2
  Bottom 0.889: BMS_I/O.5 101.6,90.15 101.6,57.15 92.71,48.26 v91.44,48.26
GND  (via drill 0.35, 0.55, 0.75, 0.9 pad 1.3, 1)
  Top 0.889: R9.1 81.59,76.52 v80.64,77.47 | R12.1 37.4,84.84 | 37.4,84.84 36.52,85.72 v34.42,85.72 | R3.2 37.4,84.84 | Q1.2 38.28,79.94 v38.23,79.88 | ISOMETER_I/O.1 122.87,5.08 C3.2 C2.2 C1.2 115.25,18.73 v116.84,20.32 | IC4.6 IC4.7 | IC4.3 IC4.6 | IC4.6 37.47,22.23 | 37.47,22.23 v36.83,22.86 | C5.2 35.24,22.23 | 35.24,22.23 37.47,22.23 | 35.24,22.23 35.24,24.45 TP24.TP | LED3.C 28.61,23.91 v28.57,23.88 | C4.2 48.26,24.13 v50.33,26.2 LED2.C | C8.2 R11.1 79.88,85.54 v79.88,82.93 | C9.2 61.33,91.44 v62.23,91.44 | C7.2 67.06,80.01 65.41,80.01 v64.77,79.38 | Q3.2 R25.1 v45.21,81.28 | Q4.2 43.12,74.61 v43.43,74.3 | R19.1 39.94,69.15 v40.77,68.33
  Top 1.27: FAN.2 41.91,11.43 v39.37,13.97
  Route15 1.27: v80.64,77.47 66.67,77.47 v64.77,79.38
  Bottom 0.889: IC1.12 IC1.11 45.97,77.83 45.97,80.01 | OK2.5 v34.42,85.72 | IC2.1 78.36,84.45 v79.88,82.93 | IC9.7 56.62,90.65 v56.64,90.68 | v64.77,79.38 66.1,78.04 C6.2 72.72,78.04 Q2.2 | v45.21,81.28 45.97,80.52 | IC1.15 45.97,81.03 45.97,80.52 | 45.97,80.01 45.97,80.52 | v55.88,73.66 55.63,73.41 IC1.8 | IC1.14 46.23,79.76 45.97,80.01 | R24.1 78.91,77.87 79.78,77.87 80.18,77.47 v80.64,77.47
  pour Route2: 0,104.14 167.64,104.14 167.64,-1.27 0,-1.27
HIGHEST_TEMP
  Top 0.508: THERAL_EX_I/O.4 26.62,87.97 TP8.TP
IMD_COIL_OUT  (via drill 0.35)
  Top 0.508: LED8.C 75.22,78.87 76.2,78.87 77.13,77.94 | 77.13,77.94 D8.A 78.4,72.39 TP14.TP | 77.13,77.94 77.13,78.95 v76.45,79.63
  Top 1.27: D8.A 77.13,61.3 K1.2
  Bottom 0.508: v76.45,79.63 76.45,77.98 76.07,77.6 Q2.3
IMD_LED-  (via drill 0.55)
  Top 0.508: MISC_I/O.3 15.22,58.42 v17.78,58.42 | v45.72,72.39 49.6,76.27 Q3.3
  Bottom 0.508: v17.78,58.42 25.4,66.04 44.45,66.04 45.72,67.31 v45.72,72.39
LOWEST_TEMP
  Top 0.508: THERAL_EX_I/O.6 26.27,86.13 TP9.TP
N$1  (via drill 0.35)
  Top 0.508: R2.1 61.91,87.63 63.75,87.63 64.39,87 | 64.39,87 v64.39,86.74 | TP16.TP 64.39,90.04 64.39,87
  Bottom 0.508: v64.39,86.74 64.01,86.36 IC9.10
N$2
  Top 0.889: F2.2 127.81,82.55 132.08,82.55 139.7,74.93 POWER/GND.2
N$3
  Route15 2.54: K2.2 96.52,41.91 115.57,41.91 139.7,66.04 146.05,66.04 161.4,81.39 PRECHARGE/AIRS.1
N$4
  Top 0.889: F1.2 121.46,81.28 130.03,81.28 140.34,70.97 POWER/GND.1
N$5  (via drill 0.35)
  Top 0.508: v38.1,87.63 39.37,88.9 v44.45,88.9 44.8,88.9 LED6.C 42.07,93.47 TP1.TP
  Bottom 0.508: OK2.6 37.47,87 v38.1,87.63 | IC1.4 53.75,78.74 50.8,78.74 49.53,80.01 49.53,86.36 46.99,88.9 v44.45,88.9
N$6  (via drill 0.35)
  Top 0.508: TP11.TP 68.2,88.77 v64.77,85.34
  Bottom 0.508: IC9.8 IC9.9 61.72,87.63 60.83,86.74 60.83,85.6 61.34,85.09 IC9.11 63.02,85.34 v64.77,85.34
N$7  (via drill 0.35)
  Top 0.508: v40.64,86.36 40.64,85.16 R3.1
  Bottom 0.508: OK2.3 41.27,87 v40.64,86.36
N$8  (via drill 0.35)
  Top 0.508: v78.87,79.98 81.41,82.52 81.41,83.19 TP17.TP
  Bottom 0.508: IC9.3 58.17,83.82 58.17,83.44 61.59,80.01 62.23,80.01 63.5,78.74 63.5,78.49 65.34,76.65 Q2.1 73.35,76.52 77.34,76.52 | R24.2 77.34,76.14 77.34,76.52 | v78.87,79.98 78.84,79.98 78.56,79.7 77.91,79.7 77.34,79.14 77.34,76.52
N$9  (via drill 0.35)
  Top 0.508: Q3.1 R25.2 51.88,81.28 52.38,81.79 52.38,83.63 v52.45,83.69 | TP5.TP 58.42,78.74 v58.42,80.01
  Bottom 0.508: v52.45,83.69 52.45,81.03 IC1.2 54.25,81.28 IC9.1 | IC9.2 IC9.1 | v58.42,80.01 57.89,80.01 IC9.1
N$10  (via drill 0.35)
  Top 0.508: v57.15,76.2 57.15,80.01 58.42,81.28 60.96,81.28 62.23,82.55 62.23,85.16 58.74,88.65 R2.2 58.69,88.95 C9.1 58.04,91.46 TP12.TP
  Bottom 0.508: IC1.6 56.9,75.95 v57.15,76.2
N$11
  Route2 2.54: K2.1 134.11,69.34 134.11,84.33 138.68,88.9 142.88,88.9 149.03,95.06 PRECHARGE/AIRS.5
  Route15 2.54: EMSDC.5 76.45,87.79 82.4,87.79 82.56,87.63 97.79,87.63 102.87,82.55 102.87,52.07 107.95,46.99 K2.1
N$12
  Bottom 2.54: PRECHARGE/AIRS.2 145.83,75.25 145.83,69.63 142.24,66.04 123.19,66.04 K2.3
N$13  (via drill 1.27 pad 1.3)
  Top 1.27: 82.55,97.79 EMSDC.1
  Top 1.905: v86.23,90.42 82.55,94.11 82.55,97.79
  Route2 1.905: K4.3 55.8,46.99 61.11,41.68 64.24,41.68 80.02,57.47 80.02,71.64 88.14,79.76 88.14,88.52 v86.23,90.42
N$14  (via drill 1.27 pad 1.3)
  Top 1.905: v80.9,90.81 78.33,93.37 EMSDC.2
  Route2 1.905: K1.4 73.15,55.37 73.15,79.38 80.9,87.12 v80.9,90.81
N$15
  Top 0.889: Q4.3 D7.A 36.61,73.78 | 36.61,73.78 LED7.C 36.61,80.23 TP21.TP | 36.61,73.78 36.61,68.8 K4.2
N$16  (via drill 0.35)
  Top 0.508: R19.2 Q4.1 43.36,72.71 44.76,71.31 50.99,71.31 55.88,76.2 55.88,82.8 v53.59,85.09 | TP2.TP 54.61,92.46 v54.61,88.9
  Bottom 0.508: v53.59,85.09 54.61,85.09 | 54.61,85.09 IC9.4 | v54.61,88.9 54.61,85.09
N$17  (via drill 0.35)
  Top 0.508: R5.1 67.62,83.37 C7.1 69.09,83.44 v69.22,83.57
  Bottom 0.508: v69.22,83.57 70.68,83.57 IC2.7 IC2.6
N$18
  Top 0.508: LED7.A R14.1
N$19
  Bottom 2.54: EMSDC.3 EMSDC.4
N$20
  Top 0.508: R15.1 71.31,78.74 LED8.A
N$21
  Route15 2.54: K1.3 72.39,39.37 36.83,39.37 K4.4
N$22
  Top 0.508: R20.2 95.1,74.86 LED1.A
N$23
  Top 0.508: LED2.A 52.36,24.1 R21.2
N$24
  Top 0.508: LED3.A R22.2
N$25
  Top 0.508: R7.2 48.13,86.17 LED4.A
N$26
  Top 0.508: R6.2 LED5.A
N$27
  Top 0.508: R8.2 LED6.A
N$28  (via drill 0.35)
  Top 0.508: v73.66,83.82 73.34,84.14 R10.1 73.66,86.68 73.66,87.63 74.61,88.58 C8.1 R11.2
  Bottom 0.508: IC2.2 74.3,83.19 v73.66,83.82
N$32
  Bottom 0.508: C6.1 68.9,80.64 IC2.5
OK_HS  (via drill 0.35, 0.55)
  Top 0.508: v40.64,91.06 38.23,93.47 TP10.TP
  Top 0.889: v119.38,36.83 109.22,36.83 91.44,54.61 63.5,54.61 53.34,64.77 v53.34,69.34
  Route2 0.889: v53.34,69.34 53.34,76.58 40.64,89.28 v40.64,91.06
  Bottom 0.508: OK2.2 41.27,88.27 40.64,88.9 v40.64,91.06
  Bottom 0.889: ISOMETER_I/O.8 119.38,22.88 v119.38,36.83
PRECHARGE_SELECT  (via drill 0.55)
  Top 0.508: TP23.TP 92.33,75.53 LED1.C 92.93,73.78 D1.A 96.86,60.62 K2.5
  Top 0.889: v109.22,88.9 101.6,81.28 TP23.TP
  Bottom 0.889: BMS_I/O.7 109.24,88.92 v109.22,88.9
READY_POWER  (via drill 0.55, 0.9)
  Top 0.889: F2.1 116.84,86.82 116.84,74.93 118.11,73.66 D2.2 120.34,68.58 127,68.58 137.16,58.42 137.16,55.88 138.58,54.46 BMS_POWER/GND.1 | v21.08,65.91 20.57,65.41 v20.57,40.51
  Route2 0.889: v90.3,65.91 90.3,66.17 91.44,67.31 91.44,71.12 95.25,74.93 111.76,74.93 118.11,81.28 F2.1
  Route15 0.889: v21.08,65.91 v90.3,65.91
  Bottom 0.889: WIFI_I/O.1 v20.57,40.51 | v20.57,40.51 | v21.08,65.91 22.1,66.93 23.5,66.93 24.51,67.95 24.51,68.73 24.51,88.9 21.85,91.56 THERAL_EX_I/O.1
STARTUP_RESET  (via drill 0.35)
  Top 0.508: R9.2 82.55,79.25 v81.53,80.26 83.06,80.26 TP4.TP | v63.75,75.18 67.31,78.74 69.01,78.74 72.18,81.92 v73.07,81.92
  Bottom 0.508: v81.53,80.26 79.88,81.92 IC2.3 v73.07,81.92 | IC1.7 58.42,74.68 | 58.42,74.68 63.25,74.68 v63.75,75.18 | 58.42,74.68 58.42,76.2 54.86,79.76 IC1.3